# EAGLE board Matriz_8x8 (EAGLE 7.6.0)

Size 73.58 x 63.39 mm. Coordinates in mm from the lower left corner, seen from the top.
Outline: 0,0 56.82,0 56.82,53.33 0,53.33 0,0
Copper layers (1*16): Top 0.035mm / dielectric 1.5mm / Bottom 0.035mm
Design rules "default": minimum track width 10mil, minimum drill 24mil, track to track 8mil, track to pad 8mil, pad to pad 8mil, via to via 8mil, smd to smd 8mil, copper to edge 40mil, drill to drill 8mil, minimum pad ring 10mil, minimum via ring 8mil, stop-mask expansion 4mil, vias tented up to drill 0mil, thermal gap 10mil

## Footprints (pad centres in the part's own frame; a part is rotated, then mirrored left to right if it is on the bottom)
LED5MM = drill 0.813 octagon: A -1.27,0; K 1.27,0
0207/10 = drill 0.813 octagon: 1 -5.08,0; 2 5.08,0
DIL16 = drill 0.813 long: 1 -8.89,-3.81; 2 -6.35,-3.81; 3 -3.81,-3.81; 4 -1.27,-3.81; 5 1.27,-3.81; 6 3.81,-3.81; 7 6.35,-3.81; 8 8.89,-3.81; 9 8.89,3.81; 10 6.35,3.81; 11 3.81,3.81; 12 1.27,3.81; 13 -1.27,3.81; 14 -3.81,3.81; 15 -6.35,3.81; 16 -8.89,3.81
ARDUINO_UNO = drill 1.016 pad 1.88: 0 63.5,50.8; 1 60.96,50.8; 2 58.42,50.8; 3 55.88,50.8; 3.3V 35.56,2.54; 4 53.34,50.8; 5 50.8,50.8; 5V 38.1,2.54; 6 48.26,50.8; 7 45.72,50.8; 8 41.656,50.8; 9 39.116,50.8; 10 36.576,50.8; 11 34.036,50.8; 12 31.496,50.8; 13 28.956,50.8; A0 50.8,2.54; A1 53.34,2.54; A2 55.88,2.54; A3 58.42,2.54; A4 60.96,2.54; A5 63.5,2.54; AREF 23.876,50.8; GND 26.416,50.8; GND. 43.18,2.54; GND.. 40.64,2.54; I/OREF 30.48,2.54; N/C 27.94,2.54; RESET 33.02,2.54; SCL 18.796,50.8; SDA 21.336,50.8; VIN 45.72,2.54 | hole 3.2: 66.04,7.62; 66.04,35.56; 15.24,50.8; 13.97,2.54

## Placement (x,y rotation side)
D1  [LED5MM]  5,924.48 0 top  (outside the outline)
D1.1  [LED5MM]  5,1724.58 0 top  (outside the outline)
D1.2  [LED5MM]  5,1711.88 0 top  (outside the outline)
D1.3  [LED5MM]  5,1699.18 0 top  (outside the outline)
D1.4  [LED5MM]  5,1686.48 0 top  (outside the outline)
D1.5  [LED5MM]  5,1673.78 0 top  (outside the outline)
D1.6  [LED5MM]  5,1661.08 0 top  (outside the outline)
D1.7  [LED5MM]  5,1648.38 0 top  (outside the outline)
D1.8  [LED5MM]  5,1635.68 0 top  (outside the outline)
D2  [LED5MM]  5,937.18 0 top  (outside the outline)
D2.1  [LED5MM]  5,1622.98 0 top  (outside the outline)
D2.2  [LED5MM]  5,1610.28 0 top  (outside the outline)
D2.3  [LED5MM]  5,1597.58 0 top  (outside the outline)
D2.4  [LED5MM]  5,1584.88 0 top  (outside the outline)
D2.5  [LED5MM]  5,1572.18 0 top  (outside the outline)
D2.6  [LED5MM]  5,1559.48 0 top  (outside the outline)
D2.7  [LED5MM]  5,1546.78 0 top  (outside the outline)
D2.8  [LED5MM]  5,1534.08 0 top  (outside the outline)
D3  [LED5MM]  5,949.88 0 top  (outside the outline)
D3.1  [LED5MM]  5,1521.38 0 top  (outside the outline)
D3.2  [LED5MM]  5,1508.68 0 top  (outside the outline)
D3.3  [LED5MM]  5,1495.98 0 top  (outside the outline)
D3.4  [LED5MM]  5,1483.28 0 top  (outside the outline)
D3.5  [LED5MM]  5,1470.58 0 top  (outside the outline)
D3.6  [LED5MM]  5,1457.88 0 top  (outside the outline)
D3.7  [LED5MM]  5,1445.18 0 top  (outside the outline)
D3.8  [LED5MM]  5,1432.48 0 top  (outside the outline)
D4  [LED5MM]  5,962.58 0 top  (outside the outline)
D5  [LED5MM]  5,975.28 0 top  (outside the outline)
D6  [LED5MM]  5,987.98 0 top  (outside the outline)
D7  [LED5MM]  5,1000.68 0 top  (outside the outline)
D8  [LED5MM]  5,1013.38 0 top  (outside the outline)
D9  [LED5MM]  5,1026.08 0 top  (outside the outline)
D10  [LED5MM]  5,1038.78 0 top  (outside the outline)
D11  [LED5MM]  5,1051.48 0 top  (outside the outline)
D12  [LED5MM]  5,1064.18 0 top  (outside the outline)
D13  [LED5MM]  5,1076.88 0 top  (outside the outline)
D14  [LED5MM]  5,1089.58 0 top  (outside the outline)
D15  [LED5MM]  5,1102.28 0 top  (outside the outline)
D16  [LED5MM]  5,1114.98 0 top  (outside the outline)
D17  [LED5MM]  5,1127.68 0 top  (outside the outline)
D18  [LED5MM]  5,1140.38 0 top  (outside the outline)
D19  [LED5MM]  5,1153.08 0 top  (outside the outline)
D20  [LED5MM]  5,1165.78 0 top  (outside the outline)
D21  [LED5MM]  5,1178.48 0 top  (outside the outline)
D22  [LED5MM]  5,1191.18 0 top  (outside the outline)
D23  [LED5MM]  5,1203.88 0 top  (outside the outline)
D24  [LED5MM]  5,1216.58 0 top  (outside the outline)
D25  [LED5MM]  5,1229.28 0 top  (outside the outline)
D26  [LED5MM]  5,1241.98 0 top  (outside the outline)
D27  [LED5MM]  5,1254.68 0 top  (outside the outline)
D28  [LED5MM]  5,1267.38 0 top  (outside the outline)
D29  [LED5MM]  5,1280.08 0 top  (outside the outline)
D30  [LED5MM]  5,1292.78 0 top  (outside the outline)
D31  [LED5MM]  5,1305.48 0 top  (outside the outline)
D32  [LED5MM]  5,1318.18 0 top  (outside the outline)
D33  [LED5MM]  5,1330.88 0 top  (outside the outline)
D34  [LED5MM]  5,1343.58 0 top  (outside the outline)
D35  [LED5MM]  5,1356.28 0 top  (outside the outline)
D36  [LED5MM]  5,1368.98 0 top  (outside the outline)
D37  [LED5MM]  5,1381.68 0 top  (outside the outline)
D38  [LED5MM]  5,1394.38 0 top  (outside the outline)
D39  [LED5MM]  5,1407.08 0 top  (outside the outline)
D40  [LED5MM]  5,1419.78 0 top  (outside the outline)
R1.1  560‎Ω  [0207/10]  5,111.68 0 top  (outside the outline)
R1.2  560‎Ω  [0207/10]  5,124.38 0 top  (outside the outline)
R1.3  560‎Ω  [0207/10]  5,340.28 0 top  (outside the outline)
R1.4  560‎Ω  [0207/10]  5,352.98 0 top  (outside the outline)
R1.5  560‎Ω  [0207/10]  5,365.68 0 top  (outside the outline)
R1.6  560‎Ω  [0207/10]  5,378.38 0 top  (outside the outline)
R1.7  560‎Ω  [0207/10]  5,391.08 0 top  (outside the outline)
R1.8  560‎Ω  [0207/10]  5,403.78 0 top  (outside the outline)
R2.1  560‎Ω  [0207/10]  5,162.48 0 top  (outside the outline)
R2.2  560‎Ω  [0207/10]  5,175.18 0 top  (outside the outline)
R2.3  560‎Ω  [0207/10]  5,187.88 0 top  (outside the outline)
R2.4  560‎Ω  [0207/10]  5,200.58 0 top  (outside the outline)
R2.5  560‎Ω  [0207/10]  5,213.28 0 top  (outside the outline)
R2.6  560‎Ω  [0207/10]  5,225.98 0 top  (outside the outline)
R2.7  560‎Ω  [0207/10]  5,238.68 0 top  (outside the outline)
R2.8  560‎Ω  [0207/10]  5,251.38 0 top  (outside the outline)
R3.1  560‎Ω  [0207/10]  5,264.08 0 top  (outside the outline)
R3.2  560‎Ω  [0207/10]  5,276.78 0 top  (outside the outline)
R3.3  560‎Ω  [0207/10]  5,289.48 0 top  (outside the outline)
R3.4  560‎Ω  [0207/10]  5,302.18 0 top  (outside the outline)
R3.5  560‎Ω  [0207/10]  5,314.88 0 top  (outside the outline)
R3.6  560‎Ω  [0207/10]  5,327.58 0 top  (outside the outline)
R3.7  560‎Ω  [0207/10]  5,137.08 0 top  (outside the outline)
R3.8  560‎Ω  [0207/10]  5,149.78 0 top  (outside the outline)
R4.1  560‎Ω  [0207/10]  5,416.48 0 top  (outside the outline)
R4.2  560‎Ω  [0207/10]  5,429.18 0 top  (outside the outline)
R4.3  560‎Ω  [0207/10]  5,441.88 0 top  (outside the outline)
R4.4  560‎Ω  [0207/10]  5,454.58 0 top  (outside the outline)
R4.5  560‎Ω  [0207/10]  5,467.28 0 top  (outside the outline)
R4.6  560‎Ω  [0207/10]  5,479.98 0 top  (outside the outline)
R4.7  560‎Ω  [0207/10]  5,492.68 0 top  (outside the outline)
R4.8  560‎Ω  [0207/10]  5,505.38 0 top  (outside the outline)
R5.1  560‎Ω  [0207/10]  5,518.08 0 top  (outside the outline)
R5.2  560‎Ω  [0207/10]  5,530.78 0 top  (outside the outline)
R5.3  560‎Ω  [0207/10]  5,543.48 0 top  (outside the outline)
R5.4  560‎Ω  [0207/10]  5,556.18 0 top  (outside the outline)
R5.5  560‎Ω  [0207/10]  5,568.88 0 top  (outside the outline)
R5.6  560‎Ω  [0207/10]  5,581.58 0 top  (outside the outline)
R5.7  560‎Ω  [0207/10]  5,594.28 0 top  (outside the outline)
R5.8  560‎Ω  [0207/10]  5,606.98 0 top  (outside the outline)
R6.1  560‎Ω  [0207/10]  5,619.68 0 top  (outside the outline)
R6.2  560‎Ω  [0207/10]  5,632.38 0 top  (outside the outline)
R6.3  560‎Ω  [0207/10]  5,645.08 0 top  (outside the outline)
R6.4  560‎Ω  [0207/10]  5,657.78 0 top  (outside the outline)
R6.5  560‎Ω  [0207/10]  5,670.48 0 top  (outside the outline)
R6.6  560‎Ω  [0207/10]  5,683.18 0 top  (outside the outline)
R6.7  560‎Ω  [0207/10]  5,695.88 0 top  (outside the outline)
R6.8  560‎Ω  [0207/10]  5,708.58 0 top  (outside the outline)
R7.1  560‎Ω  [0207/10]  5,721.28 0 top  (outside the outline)
R7.2  560‎Ω  [0207/10]  5,733.98 0 top  (outside the outline)
R7.3  560‎Ω  [0207/10]  5,746.68 0 top  (outside the outline)
R7.4  560‎Ω  [0207/10]  5,759.38 0 top  (outside the outline)
R7.5  560‎Ω  [0207/10]  5,772.08 0 top  (outside the outline)
R7.6  560‎Ω  [0207/10]  5,784.78 0 top  (outside the outline)
R7.7  560‎Ω  [0207/10]  5,797.48 0 top  (outside the outline)
R7.8  560‎Ω  [0207/10]  5,810.18 0 top  (outside the outline)
R8.1  560‎Ω  [0207/10]  5,822.88 0 top  (outside the outline)
R8.2  560‎Ω  [0207/10]  5,835.58 0 top  (outside the outline)
R8.3  560‎Ω  [0207/10]  5,848.28 0 top  (outside the outline)
R8.4  560‎Ω  [0207/10]  5,860.98 0 top  (outside the outline)
R8.5  560‎Ω  [0207/10]  5,873.68 0 top  (outside the outline)
R8.6  560‎Ω  [0207/10]  5,886.38 0 top  (outside the outline)
R8.7  560‎Ω  [0207/10]  5,899.08 0 top  (outside the outline)
R8.8  560‎Ω  [0207/10]  5,911.78 0 top  (outside the outline)
U1  [DIL16]  5,1737.28 0 top  (outside the outline)
U5  [ARDUINO_UNO]  5,10.08 0 top
U9  [DIL16]  5,22.78 0 top
U10  [DIL16]  5,35.48 0 top
U12  [DIL16]  5,73.58 0 top  (outside the outline)
U13  [DIL16]  5,48.18 0 top
U14  [DIL16]  5,60.88 0 top
U16  [DIL16]  5,86.28 0 top  (outside the outline)
U17  [DIL16]  5,98.98 0 top  (outside the outline)

## Library data of the parts
D1 D1.1-D1.8 D2 D2.1-D2.8 D3 D3.1-D3.8 D4-D40 R1.1-R1.8 R2.1-R2.8 R3.1-R3.8 R4.1-R4.8 R5.1-R5.8 R6.1-R6.8 R7.1-R7.8 R8.1-R8.8 U1 U5 U9 U10 U12-U14 U16 U17 = AUTODESK_CIRCUITS_BREADBOARD

## Nets
N$1: R3.6.1 U1.5
N$2: R2.2.1 U10.1
N$3: R1.2.1 U9.1
N$4: R1.5.1 U9.4
N$5: R1.7.1 U9.6
N$6: U1.12 U5.3 U9.12 U10.12 U12.12 U13.12 U14.12 U16.12 U17.12
N$7: R1.6.1 U9.5
N$8: U5.2 U9.14
N$9: R1.1.1 U9.15
N$10: R1.4.1 U9.3
N$11: U9.9 U10.14
N$12: U1.11 U5.4 U9.11 U10.11 U12.11 U13.11 U14.11 U16.11 U17.11
N$13: R2.7.1 U10.6
N$14: R2.8.1 U10.7
N$15: R2.6.1 U10.5
N$16: R2.1.1 U10.15
N$17: R2.4.1 U10.3
N$18: U1.14 U10.9
N$19: R1.8.1 U9.7
N$21: R1.3.1 U9.2
N$22: R2.5.1 U10.4
N$25: R3.5.1 U1.4
N$26: R3.7.1 U1.6
N$27: R3.8.1 U1.7
N$28: R3.1.1 U1.15
N$29: R3.4.1 U1.3
N$30: U1.9 U12.14
N$31: R5.2.1 U13.1
N$32: R5.5.1 U13.4
N$33: R5.7.1 U13.6
N$34: R5.8.1 U13.7
N$35: R5.3.1 U13.2
N$36: R5.6.1 U13.5
N$37: R5.1.1 U13.15
N$38: R5.4.1 U13.3
N$39: U13.9 U14.14
N$40: R6.2.1 U14.1
N$41: R6.5.1 U14.4
N$42: R6.7.1 U14.6
N$43: R6.8.1 U14.7
N$44: R6.3.1 U14.2
N$45: R6.1.1 U14.15
N$46: R6.4.1 U14.3
N$47: U14.9 U16.14
N$48: U1.10 U1.16 U5.5V U9.10 U9.16 U10.10 U10.16 U12.10 U12.16 U13.10 U13.16 U14.10 U14.16 U16.10 U16.16 U17.10 U17.16
N$49: R2.3.1 U10.2
N$50: R3.3.1 U1.2
N$51: R4.2.1 U12.1
N$52: R4.5.1 U12.4
N$53: R4.7.1 U12.6
N$54: R4.3.1 U12.2
N$55: R4.6.1 U12.5
N$56: R4.1.1 U12.15
N$57: R4.4.1 U12.3
N$58: U12.9 U13.14
N$59: R4.8.1 U12.7
N$60: R7.2.1 U16.1
N$61: R7.5.1 U16.4
N$62: R7.7.1 U16.6
N$63: R7.8.1 U16.7
N$64: R7.3.1 U16.2
N$65: R7.6.1 U16.5
N$66: R7.1.1 U16.15
N$67: R7.4.1 U16.3
N$68: U16.9 U17.14
N$69: R8.2.1 U17.1
N$70: R8.5.1 U17.4
N$71: R8.7.1 U17.6
N$72: R8.8.1 U17.7
N$73: R8.3.1 U17.2
N$74: R8.6.1 U17.5
N$75: R8.1.1 U17.15
N$76: R8.4.1 U17.3
N$77: U17.9
N$78: R6.6.1 U14.5
N$79: D1.1.A R1.1.2
N$80: D1.2.A R1.2.2
N$81: D1.3.A R1.3.2
N$82: D1.4.A R1.4.2
N$83: D1.6.A R1.6.2
N$84: D1.7.A R1.7.2
N$85: D1.8.A R1.8.2
N$86: D2.1.A R2.1.2
N$87: D2.2.A R2.2.2
N$88: D2.3.A R2.3.2
N$89: D2.4.A R2.4.2
N$90: D2.5.A R2.5.2
N$91: D2.6.A R2.6.2
N$92: D2.7.A R2.7.2
N$93: D2.8.A R2.8.2
N$94: D3.1.A R3.1.2
N$95: D3.2.A R3.2.2
N$96: D3.4.A R3.4.2
N$97: D3.6.A R3.6.2
N$98: D3.7.A R3.7.2
N$99: D3.8.A R3.8.2
N$100: D40.A R4.1.2
N$101: D39.A R4.2.2
N$102: D38.A R4.3.2
N$103: D37.A R4.4.2
N$104: D36.A R4.5.2
N$105: D35.A R4.6.2
N$106: D34.A R4.7.2
N$107: D33.A R4.8.2
N$108: D32.A R5.1.2
N$109: D31.A R5.2.2
N$110: D30.A R5.3.2
N$111: D29.A R5.4.2
N$112: D28.A R5.5.2
N$113: D27.A R5.6.2
N$114: D26.A R5.7.2
N$115: D25.A R5.8.2
N$116: D24.A R6.1.2
N$117: D23.A R6.2.2
N$118: D21.A R6.4.2
N$119: D20.A R6.5.2
N$120: D19.A R6.6.2
N$121: D18.A R6.7.2
N$122: D17.A R6.8.2
N$123: D16.A R7.1.2
N$124: D15.A R7.2.2
N$125: D14.A R7.3.2
N$126: D13.A R7.4.2
N$127: D12.A R7.5.2
N$128: D11.A R7.6.2
N$129: D10.A R7.7.2
N$130: D9.A R7.8.2
N$131: D1.A R8.1.2
N$132: D2.A R8.2.2
N$133: D3.A R8.3.2
N$134: D4.A R8.4.2
N$135: D5.A R8.5.2
N$136: D6.A R8.6.2
N$137: D7.A R8.7.2
N$138: D8.A R8.8.2
N$139: D22.A R6.3.2
N$140: D1.1.K D1.2.K D1.3.K D1.4.K D1.5.K D1.6.K D1.7.K D1.8.K D1.K D2.1.K D2.2.K D2.3.K D2.4.K D2.5.K D2.6.K D2.7.K D2.8.K D2.K D3.1.K D3.2.K D3.3.K D3.4.K D3.5.K D3.6.K D3.7.K D3.8.K D3.K D4.K D5.K D6.K D7.K D8.K D9.K D10.K D11.K D12.K D13.K D14.K D15.K D16.K D17.K D18.K D19.K D20.K D21.K D22.K D23.K D24.K D25.K D26.K D27.K D28.K D29.K D30.K D31.K D32.K D33.K D34.K D35.K D36.K D37.K D38.K D39.K D40.K U1.8 U1.13 U5.GND.. U9.8 U9.13 U10.8 U10.13 U12.8 U12.13 U13.8 U13.13 U14.8 U14.13 U16.8 U16.13 U17.8 U17.13
N$141: D1.5.A R1.5.2
N$142: D3.5.A R3.5.2
N$143: D3.3.A R3.3.2
N$144: R3.2.1 U1.1

## Tracks (layer width: path | path; a pad name or v marks a point on that pad's centre or on a via)
N$1  (1 unrouted)
N$2  (1 unrouted)
N$3  (1 unrouted)
N$4  (1 unrouted)
N$5  (1 unrouted)
N$6  (8 unrouted)
N$7  (1 unrouted)
N$8  (1 unrouted)
N$9  (1 unrouted)
N$10  (1 unrouted)
N$11  (1 unrouted)
N$12  (8 unrouted)
N$13  (1 unrouted)
N$14  (1 unrouted)
N$15  (1 unrouted)
N$16  (1 unrouted)
N$17  (1 unrouted)
N$18  (1 unrouted)
N$19  (1 unrouted)
N$21  (1 unrouted)
N$22  (1 unrouted)
N$25  (1 unrouted)
N$26  (1 unrouted)
N$27  (1 unrouted)
N$28  (1 unrouted)
N$29  (1 unrouted)
N$30  (1 unrouted)
N$31  (1 unrouted)
N$32  (1 unrouted)
N$33  (1 unrouted)
N$34  (1 unrouted)
N$35  (1 unrouted)
N$36  (1 unrouted)
N$37  (1 unrouted)
N$38  (1 unrouted)
N$39  (1 unrouted)
N$40  (1 unrouted)
N$41  (1 unrouted)
N$42  (1 unrouted)
N$43  (1 unrouted)
N$44  (1 unrouted)
N$45  (1 unrouted)
N$46  (1 unrouted)
N$47  (1 unrouted)
N$48  (16 unrouted)
N$49  (1 unrouted)
N$50  (1 unrouted)
N$51  (1 unrouted)
N$52  (1 unrouted)
N$53  (1 unrouted)
N$54  (1 unrouted)
N$55  (1 unrouted)
N$56  (1 unrouted)
N$57  (1 unrouted)
N$58  (1 unrouted)
N$59  (1 unrouted)
N$60  (1 unrouted)
N$61  (1 unrouted)
N$62  (1 unrouted)
N$63  (1 unrouted)
N$64  (1 unrouted)
N$65  (1 unrouted)
N$66  (1 unrouted)
N$67  (1 unrouted)
N$68  (1 unrouted)
N$69  (1 unrouted)
N$70  (1 unrouted)
N$71  (1 unrouted)
N$72  (1 unrouted)
N$73  (1 unrouted)
N$74  (1 unrouted)
N$75  (1 unrouted)
N$76  (1 unrouted)
N$78  (1 unrouted)
N$79  (1 unrouted)
N$80  (1 unrouted)
N$81  (1 unrouted)
N$82  (1 unrouted)
N$83  (1 unrouted)
N$84  (1 unrouted)
N$85  (1 unrouted)
N$86  (1 unrouted)
N$87  (1 unrouted)
N$88  (1 unrouted)
N$89  (1 unrouted)
N$90  (1 unrouted)
N$91  (1 unrouted)
N$92  (1 unrouted)
N$93  (1 unrouted)
N$94  (1 unrouted)
N$95  (1 unrouted)
N$96  (1 unrouted)
N$97  (1 unrouted)
N$98  (1 unrouted)
N$99  (1 unrouted)
N$100  (1 unrouted)
N$101  (1 unrouted)
N$102  (1 unrouted)
N$103  (1 unrouted)
N$104  (1 unrouted)
N$105  (1 unrouted)
N$106  (1 unrouted)
N$107  (1 unrouted)
N$108  (1 unrouted)
N$109  (1 unrouted)
N$110  (1 unrouted)
N$111  (1 unrouted)
N$112  (1 unrouted)
N$113  (1 unrouted)
N$114  (1 unrouted)
N$115  (1 unrouted)
N$116  (1 unrouted)
N$117  (1 unrouted)
N$118  (1 unrouted)
N$119  (1 unrouted)
N$120  (1 unrouted)
N$121  (1 unrouted)
N$122  (1 unrouted)
N$123  (1 unrouted)
N$124  (1 unrouted)
N$125  (1 unrouted)
N$126  (1 unrouted)
N$127  (1 unrouted)
N$128  (1 unrouted)
N$129  (1 unrouted)
N$130  (1 unrouted)
N$131  (1 unrouted)
N$132  (1 unrouted)
N$133  (1 unrouted)
N$134  (1 unrouted)
N$135  (1 unrouted)
N$136  (1 unrouted)
N$137  (1 unrouted)
N$138  (1 unrouted)
N$139  (1 unrouted)
N$140  (80 unrouted)
N$141  (1 unrouted)
N$142  (1 unrouted)
N$143  (1 unrouted)
N$144  (1 unrouted)